# Altium PCB Powerboard_SAUVC26.PcbDoc (part 2 of 2)
Units mm, origin at the board's own origin, x right, y up, seen from the top; angles counter-clockwise.
Board outline 106 x 105.68 mm, 4 copper layers (Top Layer, Layer 1, Layer 2, Bottom Layer), stack 2.288 mm thick; 93 components, 65 nets, 427 pads, 430 vias.
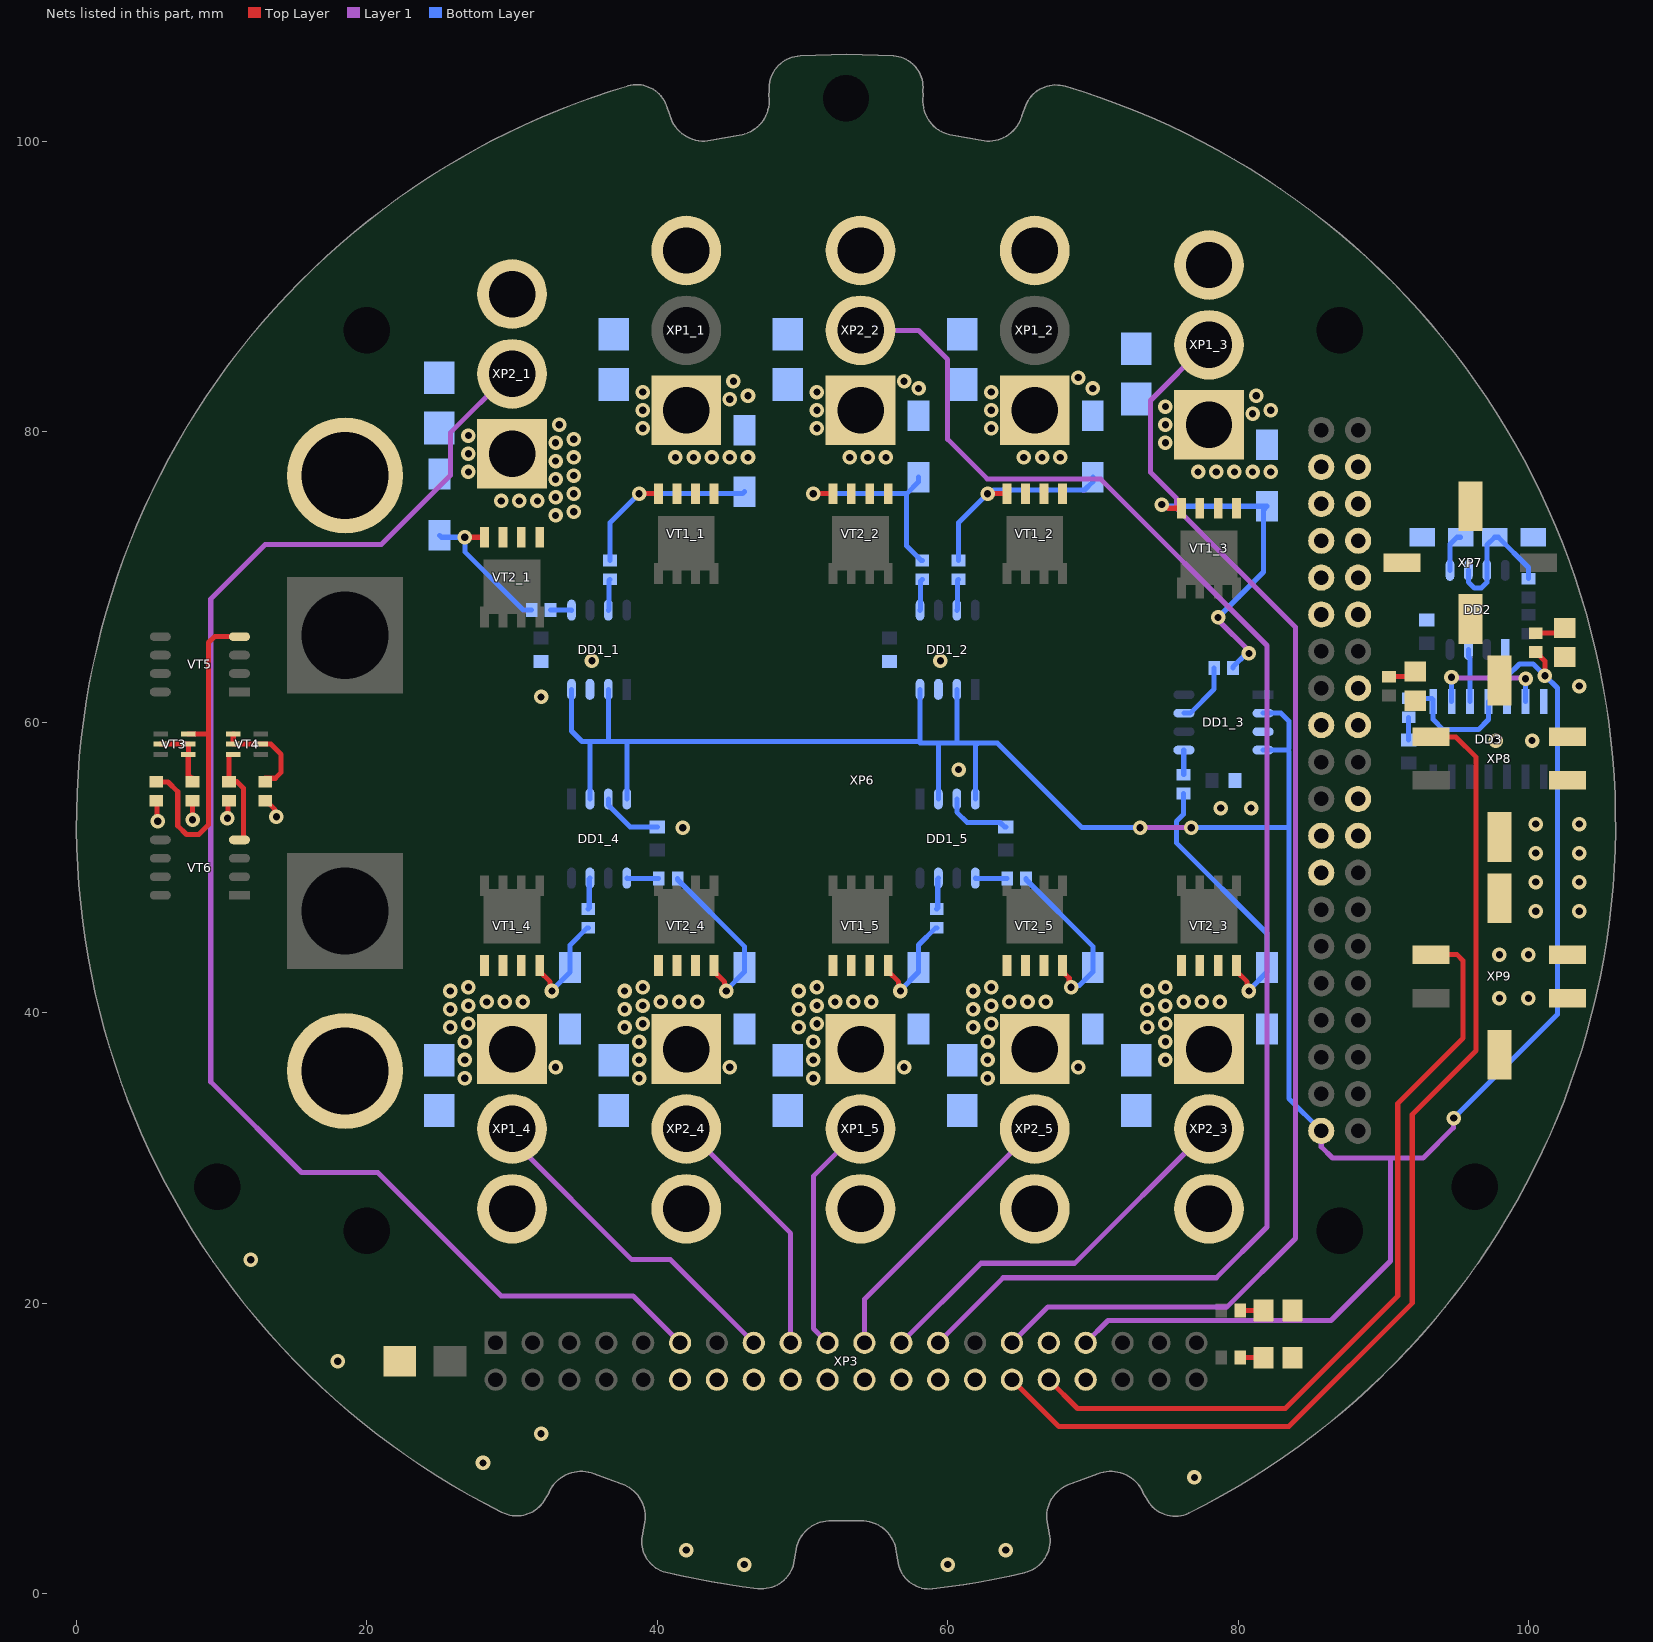
[diagram p4: the nets of this part, all layers, seen from the top]

## Via types
v1: diameter 1, hole 0.5, Top Layer to Bottom Layer, tented both sides, 430 vias

## Nets (pads, with @x,y where several pads share a name; then routed paths per layer and width w, separated by ;. In a path a pad name is that pad's centre, name@x,y a point inside that pad or via, vN(x,y) a via of type N, cw(c..) or ccw(c..) an arc to the next point about the centre after c; other vN are vias at no path point) (continued)
DSHOT1_3: XP1_3.2 XP3.29 | length 90
  Layer 1 w0.35: XP3.29@64.43,17.27 66.91,19.75 79.25,19.75 83.95,24.45 83.95,66.55 75.775,74.725 75.775,75.425 73.975,77.225 73.975,82.175 77.8,86 XP1_3.2@78,86
DSHOT1_4: XP1_4.2 XP3.15 | length 23.2
  Layer 1 w0.35: XP1_4.2@30,32 30,31.25 38.25,23 40.92,23 XP3.15@46.65,17.27
DSHOT1_5: XP1_5.2 XP3.19 | length 16.5
  Layer 1 w0.35: XP3.19@51.73,17.27 50.75,18.25 50.75,28.75 XP1_5.2@54,32
DSHOT2_1: XP2_1.2 XP3.11 | length 101.9
  Layer 1 w0.35: XP2_1.2@30,84 29.8,84 25.75,79.95 25.75,77 21,72.25 13,72.25 9.25,68.5 9.25,35.25 15.5,29 20.75,29 29.25,20.5 38.34,20.5 XP3.11@41.57,17.27
DSHOT2_2: XP2_2.2 XP3.25 | length 106.2
  Layer 1 w0.35: XP2_2.2@54,87 58,87 60,85 60,79.5 62.725,76.775 63.175,76.775 63.2,76.75 70.55,76.75 82,65.3 82,25.25 78.5,21.75 63.83,21.75 XP3.25@59.35,17.27
DSHOT2_3: XP2_3.2 XP3.23 | length 27.3
  Layer 1 w0.35: XP3.23@56.81,17.27 62.29,22.75 68.75,22.75 XP2_3.2@78,32
DSHOT2_4: XP2_4.2 XP3.17 | length 17.7
  Layer 1 w0.35: XP2_4.2@42,32 49.19,24.81 XP3.17@49.19,17.27
DSHOT2_5: XP2_5.2 XP3.21 | length 19.6
  Layer 1 w0.35: XP3.21@54.27,17.27 54.27,20.27 XP2_5.2@66,32
enable: DD1_1.2 DD1_1.4 DD1_2.2 DD1_2.4 DD1_3.2 DD1_3.4 DD1_4.2 DD1_4.4 DD1_5.2 DD1_5.4 DD3.5 R10.2 XP3.33 XP6.39 | length 198
  Top Layer w0.35: R10.2@100.5,64.85 100.575,64.85 100.8,64.625 100.8,64.55 101.133,64.217 v1(101.133,63.216)
  Layer 1 w0.35: XP3.33@69.51,17.27 71.04,18.8 86.4,18.8 90.5,22.9 90.5,30 ; v1(73.25,52.75) v1(76.775,52.75) ; XP6.39@85.73,31.87 85.73,30.77 86.5,30 90.5,30 ; v1(94.85,32.75) 94.825,32.725 94.825,32.075 92.75,30 90.5,30
  Bottom Layer w0.35: DD1_1.4@34.095,62.275 34.095,59.405 34.81,58.69 35.45,58.69 ; DD1_4.2@35.365,54.725 35.365,58.605 35.45,58.69 ; DD1_1.2@36.635,62.275 36.635,58.805 36.75,58.69 ; DD1_4.4@37.905,54.725 37.905,58.595 38,58.69 ; 58.095,58.69 38,58.69 ; DD1_2.4@58.095,62.275 58.095,58.583 59.365,58.583 ; DD1_5.2@59.365,54.725 59.365,58.583 ; DD1_2.2@60.635,62.275 60.635,58.698 60.75,58.583 ; DD1_5.4@61.905,54.725 61.905,58.405 62.083,58.583 ; v1(73.25,52.75) 69.25,52.75 63.417,58.583 62.083,58.583 ; v1(76.775,52.75) 83.5,52.75 ; DD1_3.4@81.725,58.095 83.405,58.095 ; DD1_3.2@81.725,60.635 82.955,60.635 83.5,60.09 83.5,58.19 83.405,58.095 ; XP6.39@85.73,31.87 83.5,34.1 83.5,52.75 ; v1(94.85,32.75) 102,39.9 102,62.361 101.145,63.216 v1(101.133,63.216) 100.323,64.025 99.375,64.025 98.52,63.17 DD3.5@98.52,61.441 ; 35.45,58.69 36.75,58.69 ; 36.75,58.69 38,58.69 ; 59.365,58.583 60.75,58.583 ; 60.75,58.583 62.083,58.583 ; 83.405,58.095 83.5,58 83.5,52.75
GND: C1_1.1 C1_2.1 C1_3.1 C1_4.1 C1_5.1 C2.2 C3.2 C4.1 C5.2 DD1_1.3 DD1_2.3 DD1_3.3 DD1_4.3 DD1_5.3 DD2.1 DD3.7 HL1.2 HL2.2 HL3.2 HL4.2 R3.1 R4.1 R5.1 R6.1 R13.1 VD1_1.1 VD1_2.1 VD1_3.1 VD1_4.1 VD1_5.1 VD2_1.1 VD2_2.1 VD2_3.1 VD2_4.1 VD2_5.1 VD5.1 XP1_1.3 XP1_2.3 XP1_3.3 XP1_4.3 XP1_5.3 XP2_1.3 XP2_2.3 XP2_3.3 XP2_4.3 XP2_5.3 XP3.12 XP3.14 XP3.16 XP3.18 XP3.20 XP3.22 XP3.24 XP3.26 XP3.28 XP3.31 XP3.34 XP4.N XP5.N XP6.3 XP6.4 XP6.5 XP6.6 XP6.7 XP6.8 XP6.9 XP6.10 XP6.11 XP6.12 XP6.16 XP6.17 XP6.18 XP6.22 XP6.23 XP6.24 XP6.25 XP7.0 XP7.2 XP8.0 XP8.3 XP8.4 XP9.0 XP9.3 XP9.4 | length 16.1
  Top Layer w0.35: R5.1@5.5,54.6 5.55,54.55 5.55,53.25 v1(5.6,53.2) ; v1(8,53.3) R3.1@8,54.6 ; v1(10.4,53.4) 10.45,53.45 10.45,54.55 R6.1@10.5,54.6 ; R4.1@13,54.6 13.075,54.6 13.651,54.024 13.651,53.624 v1(13.775,53.5)
  Bottom Layer w0.35: DD1_4.3@36.635,54.725 36.635,54.3 38.135,52.8 C1_4.1@40,52.8 ; DD1_5.3@60.635,54.725 60.635,53.819 61.342,53.112 63.613,53.112 63.925,52.8 C1_5.1@64,52.8 ; C5.2@91.75,58.8 R13.1@91.75,60.35
  other v1: 46,2 60,2 42,3 64,3 77,8 28,9 32,11 18,16 12,23 98,41 100,41 98,44 100,44 100.5,47 103.5,47 100.5,49 103.5,49 100.5,51 103.5,51 41.75,52.75 100.5,53 103.5,53 78.8,54.1 80.9,54.1 60.75,56.75 97.75,58.75 100.25,58.75 32,61.75 103.5,62.5 35.5,64.25 59.5,64.25
NetC2_1: C2.1 DD2.6 DD2.7 R12.1 | length 9.7
  Bottom Layer w0.35: DD2.6@95.865,70.475 95.865,69.66 96.275,69.25 96.75,69.25 97.135,69.635 DD2.7@97.135,70.475 97.135,72.21 C2.1@97.675,72.75 97.925,72.75 100,70.675 R12.1@100,69.9
NetC3_1: C3.1 DD2.5 | length 2.7
  Bottom Layer w0.35: DD2.5@94.595,70.475 94.595,72.27 95.075,72.75 C3.1@95.325,72.75
NetDD1_1_5: DD1_1.5 R1_1.1 | length 1.5
  Bottom Layer w0.35: R1_1.1@32.65,67.75 32.663,67.737 34.082,67.737 DD1_1.5@34.095,67.725
NetDD1_1_7: DD1_1.7 R2_1.1 | length 2.2
  Bottom Layer w0.35: DD1_1.7@36.635,67.725 36.683,67.773 36.683,69.783 R2_1.1@36.75,69.85
NetDD1_2_5: DD1_2.5 R1_2.1 | length 2.2
  Bottom Layer w0.35: DD1_2.5@58.095,67.725 58.143,67.773 58.143,69.743 R1_2.1@58.25,69.85
NetDD1_2_7: DD1_2.7 R2_2.1 | length 2.2
  Bottom Layer w0.35: DD1_2.7@60.635,67.725 60.683,67.773 60.683,69.783 R2_2.1@60.75,69.85
NetDD1_3_5: DD1_3.5 R1_3.1 | length 1.7
  Bottom Layer w0.35: R1_3.1@76.25,56.4 76.262,56.413 76.262,58.082 DD1_3.5@76.275,58.095
NetDD1_3_7: DD1_3.7 R2_3.1 | length 4.2
  Bottom Layer w0.35: DD1_3.7@76.275,60.635 76.7,60.635 78.35,62.285 R2_3.1@78.35,63.75
NetDD1_4_5: DD1_4.5 R1_4.1 | length 2.2
  Bottom Layer w0.35: DD1_4.5@37.905,49.275 37.917,49.263 40.087,49.263 R1_4.1@40.1,49.25
NetDD1_4_7: DD1_4.7 R2_4.1 | length 2.2
  Bottom Layer w0.35: R2_4.1@35.25,47.15 35.317,47.217 35.317,49.227 DD1_4.7@35.365,49.275
NetDD1_5_5: DD1_5.5 R1_5.1 | length 2.2
  Bottom Layer w0.35: DD1_5.5@61.905,49.275 61.917,49.262 64.087,49.262 R1_5.1@64.1,49.25
NetDD1_5_7: DD1_5.7 R2_5.1 | length 2.2
  Bottom Layer w0.35: R2_5.1@59.25,47.15 59.317,47.217 59.317,49.227 DD1_5.7@59.365,49.275
NetDD2_3: DD2.3 DD3.3 | length 3.6
  Bottom Layer w0.35: DD2.3@95.865,65.025 95.865,64.532 95.98,64.417 DD3.3@95.98,61.441
NetDD3_1: DD3.1 DD3.4 R13.2 | length 8.7
  Bottom Layer w0.35: R13.2@91.75,61.65 93.348,61.65 93.44,61.558 93.44,60.195 94.135,59.5 96.555,59.5 97.25,60.195 DD3.4@97.25,61.441
NetDD3_2: DD3.2 DD3.6 | length 8.4
  Layer 1 w0.35: v1(94.7,63.1) 94.75,63.05 99.75,63.05 v1(99.8,63)
  Bottom Layer w0.35: v1(94.7,63.1) 94.705,63.095 94.705,61.446 DD3.2@94.71,61.441 ; DD3.6@99.79,61.441 99.795,61.446 99.795,62.995 v1(99.8,63)
NetHL1_1: HL1.1 R7.1 | length 1.8
  Top Layer w0.35: R7.1@90.5,63.15 91.85,63.15 HL1.1@92.2,63.5
NetHL2_1: HL2.1 R8.1 | length 1.6
  Top Layer w0.35: R8.1@80.15,19.5 HL2.1@81.75,19.5
NetHL3_1: HL3.1 R9.1 | length 1.6
  Top Layer w0.35: R9.1@80.15,16.25 HL3.1@81.75,16.25
NetHL4_1: HL4.1 R10.1 | length 2.1
  Top Layer w0.35: R10.1@100.5,66.15 102.15,66.15 HL4.1@102.5,66.5
NetR1_1_2: R1_1.2 VD4_1.2 VT2_1.4 | length 10.4
  Top Layer w0.35: v1(26.75,72.75) 28.09,72.75 VT2_1.4@28.095,72.745
  Bottom Layer w0.35: VD4_1.2@25,72.885 25.135,72.75 v1(26.75,72.75) 26.75,71.75 30.75,67.75 R1_1.2@31.35,67.75
NetR1_2_2: R1_2.2 VD4_2.2 VT2_2.4 | length 14.3
  Top Layer w0.35: v1(50.75,75.75) 52.09,75.75 VT2_2.4@52.095,75.745
  Bottom Layer w0.35: v1(50.75,75.75) 57.175,75.75 ; VD4_2.2@58,76.885 58,76.575 57.175,75.75 ; R1_2.2@58.25,71.15 58.175,71.15 57.175,72.15 57.175,75.75
NetR1_3_2: R1_3.2 VD4_3.2 VT2_3.4 | length 19
  Top Layer w0.35: VT2_3.4@79.905,43.255 79.905,42.85 80.626,42.129 80.626,41.624 v1(80.75,41.5)
  Bottom Layer w0.35: R1_3.2@76.25,55.1 76.25,53.675 75.75,53.175 75.75,51.712 82,45.462 VD4_3.2@82,43.115 82,42.805 80.75,41.555 v1(80.75,41.5)
NetR1_4_2: R1_4.2 VD4_4.2 VT2_4.4 | length 12.3
  Top Layer w0.35: VT2_4.4@43.905,43.255 43.905,42.85 44.626,42.129 44.626,41.624 v1(44.75,41.5)
  Bottom Layer w0.35: R1_4.2@41.4,49.25 41.4,49.175 46,44.575 VD4_4.2@46,43.115 46,42.805 44.75,41.555 v1(44.75,41.5)
NetR1_5_2: R1_5.2 VD4_5.2 VT2_5.4 | length 12
  Top Layer w0.35: VT2_5.4@67.905,43.255 67.905,42.85 68.376,42.379 68.376,41.874 v1(68.5,41.75)
  Bottom Layer w0.35: R1_5.2@65.4,49.25 65.4,49.175 70,44.575 VD4_5.2@70,43.115 70,42.805 69.069,41.874 68.624,41.874 v1(68.5,41.75)
NetR2_1_2: R2_1.2 VD3_1.1 VT1_1.4 | length 14.1
  Top Layer w0.35: v1(38.75,75.75) 40.09,75.75 VT1_1.4@40.095,75.745
  Bottom Layer w0.35: R2_1.2@36.75,71.15 36.75,73.75 v1(38.75,75.75) 45.865,75.75 VD3_1.1@46,75.885
NetR2_2_2: R2_2.2 VD3_2.1 VT1_2.4 | length 14.7
  Top Layer w0.35: v1(62.75,75.75) 64.09,75.75 VT1_2.4@64.095,75.745
  Bottom Layer w0.35: R2_2.2@60.75,71.15 60.75,73.75 v1(62.75,75.75) 62.926,75.75 63.176,76 69.425,76 70,76.575 VD3_2.1@70,76.885
NetR2_3_2: R2_3.2 VD3_3.1 VT1_3.4 | length 22.7
  Top Layer w0.35: v1(74.75,75) 74.926,75 75.181,74.745 VT1_3.4@76.095,74.745
  Layer 1 w0.35: v1(78.625,67.225) 78.625,67.05 80.75,64.925 v1(80.75,64.75)
  Bottom Layer w0.35: v1(74.75,75) 74.865,74.885 VD3_3.1@82,74.885 81.75,74.635 81.75,70.35 v1(78.625,67.225) ; R2_3.2@79.65,63.75 79.65,63.825 80.575,64.75 v1(80.75,64.75)
NetR2_4_2: R2_4.2 VD3_4.1 VT1_4.4 | length 7.5
  Top Layer w0.35: VT1_4.4@31.905,43.255 31.905,42.85 32.626,42.129 32.626,41.624 v1(32.75,41.5)
  Bottom Layer w0.35: v1(32.75,41.5) 32.75,41.555 34,42.805 VD3_4.1@34,43.115 34,44.675 35.175,45.85 R2_4.2@35.25,45.85
NetR2_5_2: R2_5.2 VD3_5.1 VT1_5.4 | length 7.5
  Top Layer w0.35: VT1_5.4@55.905,43.255 55.905,42.85 56.626,42.129 56.626,41.624 v1(56.75,41.5)
  Bottom Layer w0.35: v1(56.75,41.5) 56.75,41.555 58,42.805 VD3_5.1@58,43.115 58,44.675 59.175,45.85 R2_5.2@59.25,45.85
NetR3_2: R3.2 VT3.1 VT3.2 VT3.5 | length 4.4
  Top Layer w0.35: VT3.5@5.795,58.5 VT3.2@7.705,58.5 7.705,57.8 VT3.1@7.7,57.8 7.7,56.375 7.925,56.15 R3.2@8,56.15
NetR4_2: R4.2 VT4.1 VT4.2 VT4.5 | length 6.8
  Top Layer w0.35: VT4.2@10.795,58.5 VT4.2@10.8,58.5 ; VT4.1@10.8,59.2 VT4.2@10.8,58.5 ; R4.2@13,56.15 13.69,56.15 14.1,56.56 14.1,57.792 13.392,58.5 VT4.5@12.705,58.5 VT4.2@10.8,58.5
NetR5_2: R5.2 VT3.3 VT5.4 | length 23
  Top Layer w0.35: R5.2@5.5,55.9 6.3,55.9 6.975,55.225 6.975,52.875 7.575,52.275 8.425,52.275 9.1,52.95 9.1,59.2 ; VT3.3@7.7,59.2 9.1,59.2 ; VT5.4@11.225,65.905 9.51,65.905 9.1,65.495 9.1,59.2
NetR6_2: R6.2 VT4.3 VT6.4 | length 7
  Top Layer w0.35: VT4.3@10.8,57.8 10.5,57.8 10.5,56.15 10.725,55.925 11.042,55.925 11.5,55.467 11.5,52.02 11.385,51.905 VT6.4@11.225,51.905
NetVD1_1_2: VD1_1.2 VD4_1.1 VT2_1.1 VT2_1.2 VT2_1.3 XP2_1.1
  other v1: 33,74.25 34.25,74.5 29.25,75.25 30.5,75.25 31.75,75.25 33,75.5 34.25,75.75 33,76.75 34.25,77 27,77.25 33,78 34.25,78.25 27,78.5 33,79.25 34.25,79.5 27,79.75 33.25,80.5
NetVD1_2_2: VD1_2.2 VD4_2.1 VT2_2.1 VT2_2.2 VT2_2.3 XP2_2.1
  other v1: 53.25,78.25 54.5,78.25 55.75,78.25 51,80.25 51,81.5 51,82.75 58,83 57,83.5
NetVD1_3_2: VD1_3.2 VD4_3.1 VT2_3.1 VT2_3.2 VT2_3.3 XP2_3.1
  other v1: 75,36.75 75,38 73.75,39 75,39.25 73.75,40.25 75,40.5 76.25,40.75 77.5,40.75 78.75,40.75 73.75,41.5 75,41.75
NetVD1_4_2: VD1_4.2 VD4_4.1 VT2_4.1 VT2_4.2 VT2_4.3 XP2_4.1
  other v1: 38.75,35.5 45,36.25 38.75,36.75 38.75,38 37.75,39 39,39.25 37.75,40.25 39,40.5 40.25,40.75 41.5,40.75 42.75,40.75 37.75,41.5 39,41.75
NetVD1_5_2: VD1_5.2 VD4_5.1 VT2_5.1 VT2_5.2 VT2_5.3 XP2_5.1
  other v1: 62.75,35.5 69,36.25 62.75,36.75 62.75,38 61.75,39 63,39.25 61.75,40.25 63,40.5 64.25,40.75 65.5,40.75 66.75,40.75 61.75,41.5 63,41.75
NetVD2_1_2: VD2_1.2 VD3_1.2 VT1_1.1 VT1_1.2 VT1_1.3 XP1_1.1
  other v1: 41.25,78.25 42.5,78.25 43.75,78.25 45,78.25 46.25,78.25 39,80.25 39,81.5 45,82.25 46.25,82.5 39,82.75 45.25,83.5
NetVD2_2_2: VD2_2.2 VD3_2.2 VT1_2.1 VT1_2.2 VT1_2.3 XP1_2.1
  other v1: 65.25,78.25 66.5,78.25 67.75,78.25 63,80.25 63,81.5 63,82.75 70,83 69,83.75
NetVD2_3_2: VD2_3.2 VD3_3.2 VT1_3.1 VT1_3.2 VT1_3.3 XP1_3.1
  other v1: 77.25,77.25 78.5,77.25 79.75,77.25 81,77.25 82.25,77.25 75,79.25 75,80.5 81,81.25 82.25,81.5 75,81.75 81.25,82.5
NetVD2_4_2: VD2_4.2 VD3_4.2 VT1_4.1 VT1_4.2 VT1_4.3 XP1_4.1
  other v1: 26.75,35.5 33,36.25 26.75,36.75 26.75,38 25.75,39 27,39.25 25.75,40.25 27,40.5 28.25,40.75 29.5,40.75 30.75,40.75 25.75,41.5 27,41.75
NetVD2_5_2: VD2_5.2 VD3_5.2 VT1_5.1 VT1_5.2 VT1_5.3 XP1_5.1
  other v1: 50.75,35.5 57,36.25 50.75,36.75 50.75,38 49.75,39 51,39.25 49.75,40.25 51,40.5 52.25,40.75 53.5,40.75 54.75,40.75 49.75,41.5 51,41.75
PWM1: XP3.30 XP8.2 | length 75.5
  Top Layer w0.35: XP3.30@64.43,14.73 67.66,11.5 83.5,11.5 92,20 92,33 96.4,37.4 96.4,57.6 95,59 XP8.2@93.3,59
PWM2: XP3.32 XP9.2 | length 55.4
  Top Layer w0.35: XP3.32@66.97,14.73 68.95,12.75 83.25,12.75 91,20.5 91,33.75 95.5,38.25 95.5,43.59 95.09,44 XP9.2@93.3,44
pads on no net: DD1_1.1 DD1_1.8 DD1_2.1 DD1_2.8 DD1_3.1 DD1_3.8 DD1_4.1 DD1_4.8 DD1_5.1 DD1_5.8 DD3.8 DD3.9 DD3.10 DD3.11 DD3.12 DD3.13 XP6.NC

## Polygon pours and split planes (outlines as drawn)
+16В on Top Layer "+16В_L01_P097" (solid, pour order 97): 15.501,17.5 13.75,17.5 cw(c52.715,53.015) 2.095,67.755 7.995,67.755 8.5,67.25 8.5,61.5 8,61 4.75,61 4.75,59.5 3.845,58.595 3.845,57.155 4.375,56.625 4.375,52.875 4.75,52.5 6.75,52.5 8.75,50.5 8.75,47.25 9,47 9,38.75 18.25,29.5 18.25,27.25 18.273,27.227 18,26.954 18,24.25 20.25,22 25.75,22 28.5,19.25 37.25,19.25 37.75,18.75 37.75,14 36.75,13 26.426,13 24,15.426 24,17.5
GND on Top Layer "GND_TOP_THRL" (solid, remove dead copper, pour order 123): 0.008,53.007 ccw(c53.008,53.007) 53.008,0.007 ccw(c53.008,53.007) 106.008,53.007 ccw(c53.008,53.007) 53.008,106.007 ccw(c53.008,53.007)
+16В_АКБ2 on Top Layer "NONET_L-01_P-001" (solid, pour order 1): 14.25,47 13.75,47.5 9.75,47.5 9.5,47.75 9.5,51 9.75,51.25 14.25,51.25 14.5,51.5 14.5,53.5 18,57 68,57 72.5,61.5 72.5,73 81.5,73 81.5,44.75 26.75,44.75 23,41 14.25,41
NetVD2_4_2 on Top Layer "NONET_L-01_P-001" (solid, pour order 96): 33.5,41.25 33,41.75 31.25,41.75 31.25,44.25 25,44.25 25,36 26.25,34.75 32.5,34.75 33.5,35.75
NetVD1_1_2 on Top Layer "NONET_L-01_P-001" (solid, pour order 18): 26.5,74.75 27,74.25 28.75,74.25 28.75,71.75 35,71.75 35,80 33.75,81.25 27.5,81.25 26.5,80.25
+16В_АКБ1 on Top Layer "NONET_L-01_P-001" (solid, pour order 0): 13.5,69.25 13.5,65.25 9.75,65.25 9.5,65 9.5,61.75 10,61.25 13.25,61.25 17,57.5 67.5,57.5 71.75,61.75 71.75,74 35.5,74 33,71.5 15.75,71.5
NetVD1_4_2 on Top Layer "NONET_L-01_P-001" (solid, pour order 95): 45.5,41.25 45,41.75 43.25,41.75 43.25,44.25 37,44.25 37,36 38.25,34.75 44.5,34.75 45.5,35.75
NetVD2_5_2 on Top Layer "NONET_L-01_P-001" (solid, pour order 94): 57.5,41.25 57,41.75 55.25,41.75 55.25,44.25 49,44.25 49,36 50.25,34.75 56.5,34.75 57.5,35.75
NetVD1_5_2 on Top Layer "NONET_L-01_P-001" (solid, pour order 93): 69.5,41.25 69,41.75 67.25,41.75 67.25,44.25 61,44.25 61,36 62.25,34.75 68.5,34.75 69.5,35.75
NetVD1_3_2 on Top Layer "NONET_L-01_P-001" (solid, pour order 92): 81.5,41.25 81,41.75 79.25,41.75 79.25,44.25 73,44.25 73,36 74.25,34.75 80.5,34.75 81.5,35.75
NetVD2_3_2 on Top Layer "NONET_L-01_P-001" (solid, pour order 78): 74.5,76.75 75,76.25 76.75,76.25 76.75,73.75 83,73.75 83,82 81.75,83.25 75.5,83.25 74.5,82.25
NetVD2_2_2 on Top Layer "NONET_L-01_P-001" (solid, pour order 67): 62.5,77.75 63,77.25 64.75,77.25 64.75,74.75 71,74.75 71,83 69.75,84.25 63.5,84.25 62.5,83.25
NetVD1_2_2 on Top Layer "NONET_L-01_P-001" (solid, pour order 20): 50.5,77.75 51,77.25 52.75,77.25 52.75,74.75 59,74.75 59,83 57.75,84.25 51.5,84.25 50.5,83.25
NetVD2_1_2 on Top Layer "NONET_L-01_P-001" (solid, pour order 19): 38.5,77.75 39,77.25 40.75,77.25 40.75,74.75 47,74.75 47,83 45.75,84.25 39.5,84.25 38.5,83.25
+12В_servo on Top Layer "12V_SERVO_CON" (solid, pour order 100): 92,45.5 92.5,46 92.5,53.5 93.75,54.75 94.75,54.75 95.25,55.25 95.25,57 94.75,57.5 91.5,57.5 89.75,55.75 89.75,44 88.25,42.5 88.25,38.25 89,38.25 90.5,39.75 94.75,39.75 95,40 95,42 94.25,42.75 91.945,42.75 91.68,43.015 91.68,45.18
+12В_servo on Top Layer "12V_SERVO_DC" (solid, pour order 99): 87,31.25 87.75,30.5 88.75,30.5 89.5,31.25 89.5,42.75 89,43.25 87.5,43.25 87,42.75 87,41 86.75,40.75 85,40.75 84.5,40.25 84.5,33.75 85,33.25 86.75,33.25 87,33
GND on Bottom Layer "GND_BOT_THRL" (solid, remove dead copper, pour order 91): 0.008,53.007 ccw(c53.008,53.007) 53.008,0.007 ccw(c53.008,53.007) 106.008,53.007 ccw(c53.008,53.007) 53.008,106.007 ccw(c53.008,53.007)
NetVD2_2_2 on Bottom Layer "NONET_L-01_P-001" (solid, pour order 42): 70.5,77.25 71,77.75 71,83 69.75,84.25 63.5,84.25 62.75,85 59.75,85 59.25,84.5 59.25,81.5 62.5,78.25 63.5,77.25
NetVD1_2_2 on Bottom Layer "NONET_L-01_P-001" (solid, pour order 41): 58.5,77.25 59,77.75 59,83 57.75,84.25 51.5,84.25 50.75,85 47.75,85 47.25,84.5 47.25,81.5 50.5,78.25 51.5,77.25
+16В on Bottom Layer "NONET_L-01_P-001" (solid, pour order 17): 87,43 87.25,43.25 89,43.25 89.5,43.75 89.5,50.25 89,50.75 87.5,50.75 87,50.25 87,48.5 86.75,48.25 85,48.25 84.5,47.75 84.5,41.25 85,40.75 86.5,40.75 87,41.25
NetVD1_1_2 on Bottom Layer "NONET_L-01_P-001" (solid, pour order 30): 27.5,81.25 26.75,82 23.75,82 23.25,81.5 23.25,76 24,75.25 26.5,75.25 28.25,73.5 34.25,73.5 35,74.25 35,80 33.75,81.25
NetVD1_5_2 on Bottom Layer "NONET_L-01_P-001" (solid, pour order 46): 71,37.25 71,39.75 70.75,40 69,40 67.25,41.75 67.25,44.25 63.5,44.25 59.5,40.25 59.5,36 60.5,35 68.75,35
NetVD1_3_2 on Bottom Layer "NONET_L-01_P-001" (solid, pour order 47): 83,37.25 83,39.75 82.75,40 81,40 79.25,41.75 79.25,44.25 75.5,44.25 71.5,40.25 71.5,36 72.5,35 80.75,35
NetVD2_5_2 on Bottom Layer "NONET_L-01_P-001" (solid, pour order 45): 59,37.25 59,39.75 58.75,40 57,40 55.25,41.75 55.25,44.25 51.5,44.25 47.5,40.25 47.5,36 48.5,35 56.75,35
NetVD1_4_2 on Bottom Layer "NONET_L-01_P-001" (solid, pour order 44): 47,37.25 47,39.75 46.75,40 45,40 43.25,41.75 43.25,44.25 39.5,44.25 35.5,40.25 35.5,36 36.5,35 44.75,35
NetVD2_3_2 on Bottom Layer "NONET_L-01_P-001" (solid, pour order 43): 82.5,76.25 83,76.75 83,82 81.75,83.25 75.5,83.25 74.75,84 71.75,84 71.25,83.5 71.25,80.5 74.5,77.25 75.5,76.25
NetVD2_1_2 on Bottom Layer "NONET_L-01_P-001" (solid, pour order 40): 46.5,77.25 47,77.75 47,83 45.75,84.25 39.5,84.25 38.75,85 35.75,85 35.25,84.5 35.25,81.5 38.5,78.25 39.5,77.25
NetVD2_4_2 on Bottom Layer "NONET_L-01_P-001" (solid, pour order 39): 35,37.25 35,39.75 34.75,40 33,40 31.25,41.75 31.25,44.25 27.5,44.25 23.5,40.25 23.5,36 24.5,35 32.75,35
+16В on Bottom Layer "NONET_L-01_P-001" (solid, pour order 16): 26.75,19 37.75,19 37.75,13.25 26.75,13.25
GND on Layer 1 "GND_MID1_THRL" (solid, remove dead copper, pour order 121): 0.008,53.007 ccw(c53.008,53.007) 53.008,0.007 ccw(c53.008,53.007) 106.008,53.007 ccw(c53.008,53.007) 53.008,106.007 ccw(c53.008,53.007)
+16В_АКБ2 on Layer 1 "NONET_L-01_P-001" (solid, remove dead copper, pour order 21): 70.5,61 70.75,61.25 70.75,75.25 81.5,75.25 81.5,45 81.465,45 81.465,43 25,43 23,41 15,41 13,43 13,57.25 66.75,57.25
+16В_АКБ1 on Layer 1 "NONET_L-01_P-001" (solid, remove dead copper, pour order 3): 13,57.25 65.75,57.25 70,61.5 70,76 37.5,76 34.5,73 16,73 13,70
NetVD2_3_2 on Layer 1 "NONET_L-01_P-001" (solid, pour order 115): 83,75.5 83,82 81.75,83.25 75.5,83.25 74.5,82.25 74.5,76.75 75.75,75.5
NetVD2_4_2 on Layer 1 "NONET_L-01_P-001" (solid, pour order 120): 25,42.5 25,36 26.25,34.75 32.5,34.75 33.5,35.75 33.5,41.25 32.25,42.5
NetVD1_4_2 on Layer 1 "NONET_L-01_P-001" (solid, pour order 119): 37,42.5 37,36 38.25,34.75 44.5,34.75 45.5,35.75 45.5,41.25 44.25,42.5
NetVD2_5_2 on Layer 1 "NONET_L-01_P-001" (solid, pour order 118): 49,42.5 49,36 50.25,34.75 56.5,34.75 57.5,35.75 57.5,41.25 56.25,42.5
NetVD1_5_2 on Layer 1 "NONET_L-01_P-001" (solid, pour order 117): 61,42.5 61,36 62.25,34.75 68.5,34.75 69.5,35.75 69.5,41.25 68.25,42.5
NetVD1_3_2 on Layer 1 "NONET_L-01_P-001" (solid, pour order 116): 73,42.5 73,36 74.25,34.75 80.5,34.75 81.5,35.75 81.5,41.25 80.25,42.5
NetVD2_2_2 on Layer 1 "NONET_L-01_P-001" (solid, pour order 114): 71,76.5 71,83 69.75,84.25 63.5,84.25 62.5,83.25 62.5,77.75 63.75,76.5
NetVD1_2_2 on Layer 1 "NONET_L-01_P-001" (solid, pour order 113): 59,76.5 59,83 57.75,84.25 51.5,84.25 50.5,83.25 50.5,77.75 51.75,76.5
NetVD2_1_2 on Layer 1 "NONET_L-01_P-001" (solid, pour order 112): 47,76.5 47,83 45.75,84.25 39.5,84.25 38.5,83.25 38.5,77.75 39.75,76.5
NetVD1_1_2 on Layer 1 "NONET_L-01_P-001" (solid, pour order 80): 35,73.5 35,80 33.75,81.25 27.5,81.25 26.5,80.25 26.5,74.75 27.75,73.5
GND on Layer 2 "GND_MID2_THRL" (solid, remove dead copper, pour order 82): 0.008,53.007 ccw(c53.008,53.007) 53.008,0.007 ccw(c53.008,53.007) 106.008,53.007 ccw(c53.008,53.007) 53.008,106.007 ccw(c53.008,53.007)

## Keep-outs
Top Layer:
  circle w0.2: c53,103 r2.6
  circle w0.2: c20,25 r2.6
  circle w0.2: c9.75,28 r2.6
  circle w0.2: c20,87 r2.6
  circle w0.2: c87,87 r2.6
  circle w0.2: c87,25 r2.6
  circle w0.2: c96.25,28 r2.6
Layer 2:
  circle w0.2: c20,25 r2
Bottom Layer:
  circle w0.2: c20,87 r2.6
  circle w0.2: c53,103 r2.6
  circle w0.2: c87,87 r2.6
  circle w0.2: c96.25,28 r2.6
  circle w0.2: c87,25 r2.6
  circle w0.2: c20,25 r2.6
  circle w0.2: c9.75,28 r2.6

## Silkscreen, mask and mechanical layers (free items; w line width, h text height)
Top Overlay:
  lines w0.2: 39.5,7.5 40,8 39.5,8.5 39.5,7.5 ; 40.5,3.75 40.5,9.25 48.5,9.25 48.5,3.75 40.5,3.75 ; 49,8 49.5,7.5 49.5,8.5 49,8 ; 50.25,6.75 50.25,9.25 57,9.25 57,6.75 50.25,6.75 ; 57.25,4.75 57.75,5.25 57.25,5.75 57.25,4.75 ; 57.5,8 58,7.5 58,8.5 57.5,8 ; 58.25,4.25 58.25,5.25 58.25,8.25 65.5,8.25 65.5,4.25 58.25,4.25 ; 91.25,40.5 91.75,41 91.25,41.5 91.25,40.5 ; 91.25,55.5 91.25,56.5 91.75,56 91.25,55.5 ; 100.25,72.75 100.75,72.25 101.25,72.75 100.25,72.75
  text "BTN" at 92.421,78.199 h2.2
  text "VBAT1 / MARCH" at 5.863,71.635 h2.2
  text "EN" at 100.488,67.517 h1.8
  text "12V SRV" at 90.75,64.587 h1.8
  text "SRV1" at 91.652,49.416 h2.2
  text "SRV2" at 91.517,34.666 h2.2
  text "VBAT2 / LAG+ / VERT" at 6.443,32.338 h2.2
  text "+5V" at 85.991,18.433 h2.2
  text "+12V" at 84.983,15.683 h2.2
  text "THRUSTER" at 40.7,11.7 h1
  text "BUTTON" at 50.95,11.7 h1
  text "SERVO" at 58.95,10.7 h1
  text "PINOUT" at 40.95,10.2 h1
  text "PINOUT" at 50.95,10.2 h1
  text "PINOUT" at 58.95,9.2 h1
  text "+24V" at 41.2,7.45 h1
  text "GND" at 50.95,7.45 h1
  text "EN" at 54.7,7.45 h1
  text "PWM" at 58.95,6.45 h1
  text "GND" at 62.2,6.45 h1
  text "CONTROL" at 41.2,5.95 h1
  text "12V" at 58.95,4.95 h1
  text "GND" at 62.2,4.95 h1
  text "GND" at 41.2,4.45 h1
Bottom Overlay:
  drawing of 3 lines, arcs and shapes, not listed
  text "Developed by Gleb M." at 2.533,43.2 h1 r270
  text "V1.0" at 6.2,35.2 h1 r270
  text "POWERBOARD SAUVC26" at 8.2,35.2 h1 r270
  text "Hydronautics team" at 10.533,35.2 h1 r270
Board Shape:
  lines w0.2: 37.981,103.837 cw(c38.577,101.721) 40.693,102.317 40.836,101.95 ccw(c43.191,102.441) 43.682,100.087 cw(c53,53) 45.651,100.434 ccw(c45.308,102.815) 47.689,103.159 47.698,103.553 cw(c49.946,103.658) 49.84,105.906 cw(c53,53) 56.274,105.899 ; 37.984,103.828 ccw(c53,53) 29.284,5.602 ccw(c30.316,7.601) 32.315,6.569 32.52,6.906 cw(c34.754,6.013) 35.647,8.246 ccw(c53,53) 37.526,7.563 cw(c36.774,5.278) 39.059,4.526 39,4.137 ccw(c41.13,3.594) 40.588,1.464 ; 40.59,1.473 ccw(c53,53) 46.925,0.349 ccw(c47.211,2.581) 49.443,2.294 49.521,2.681 cw(c51.925,2.606) 52,5.01 ccw(c53,53) 54,5.01 cw(c54.075,2.606) 56.479,2.681 56.556,2.295 ccw(c58.744,2.514) 58.963,0.327 ; 56.274,105.908 cw(c56.11,103.716) 58.302,103.552 58.312,103.158 ccw(c60.692,102.815) 60.349,100.434 cw(c53,53) 62.318,100.087 ccw(c62.81,102.442) 65.164,101.95 65.308,102.318 cw(c67.456,101.648) 68.125,103.796 cw(c53,53) 76.614,5.551 ; 58.962,0.336 ccw(c53,53) 65.299,1.447 ccw(c64.805,3.642) 67,4.136 66.94,4.526 cw(c69.226,5.277) 68.474,7.563 ccw(c53,53) 70.353,8.246 cw(c71.246,6.013) 73.479,6.906 73.684,6.569 ccw(c75.665,7.523) 76.619,5.543
Mechanical 12 (Mech12):
  circle w0.015: c53.008,103.007 r1.5
  circle w0.015: c96.309,28.007 r1.5
  circle w0.015: c9.706,28.007 r1.5